# Altium PCB QuickRotor_V1.PcbDoc
Units mil, origin at the board's own origin, x right, y up, seen from the top; angles counter-clockwise.
Board outline 3949.52 x 3949.5 mil, 2 copper layers (Top, Bottom), stack 60.473 mil thick; 66 components, 73 nets, 259 pads, 123 vias.
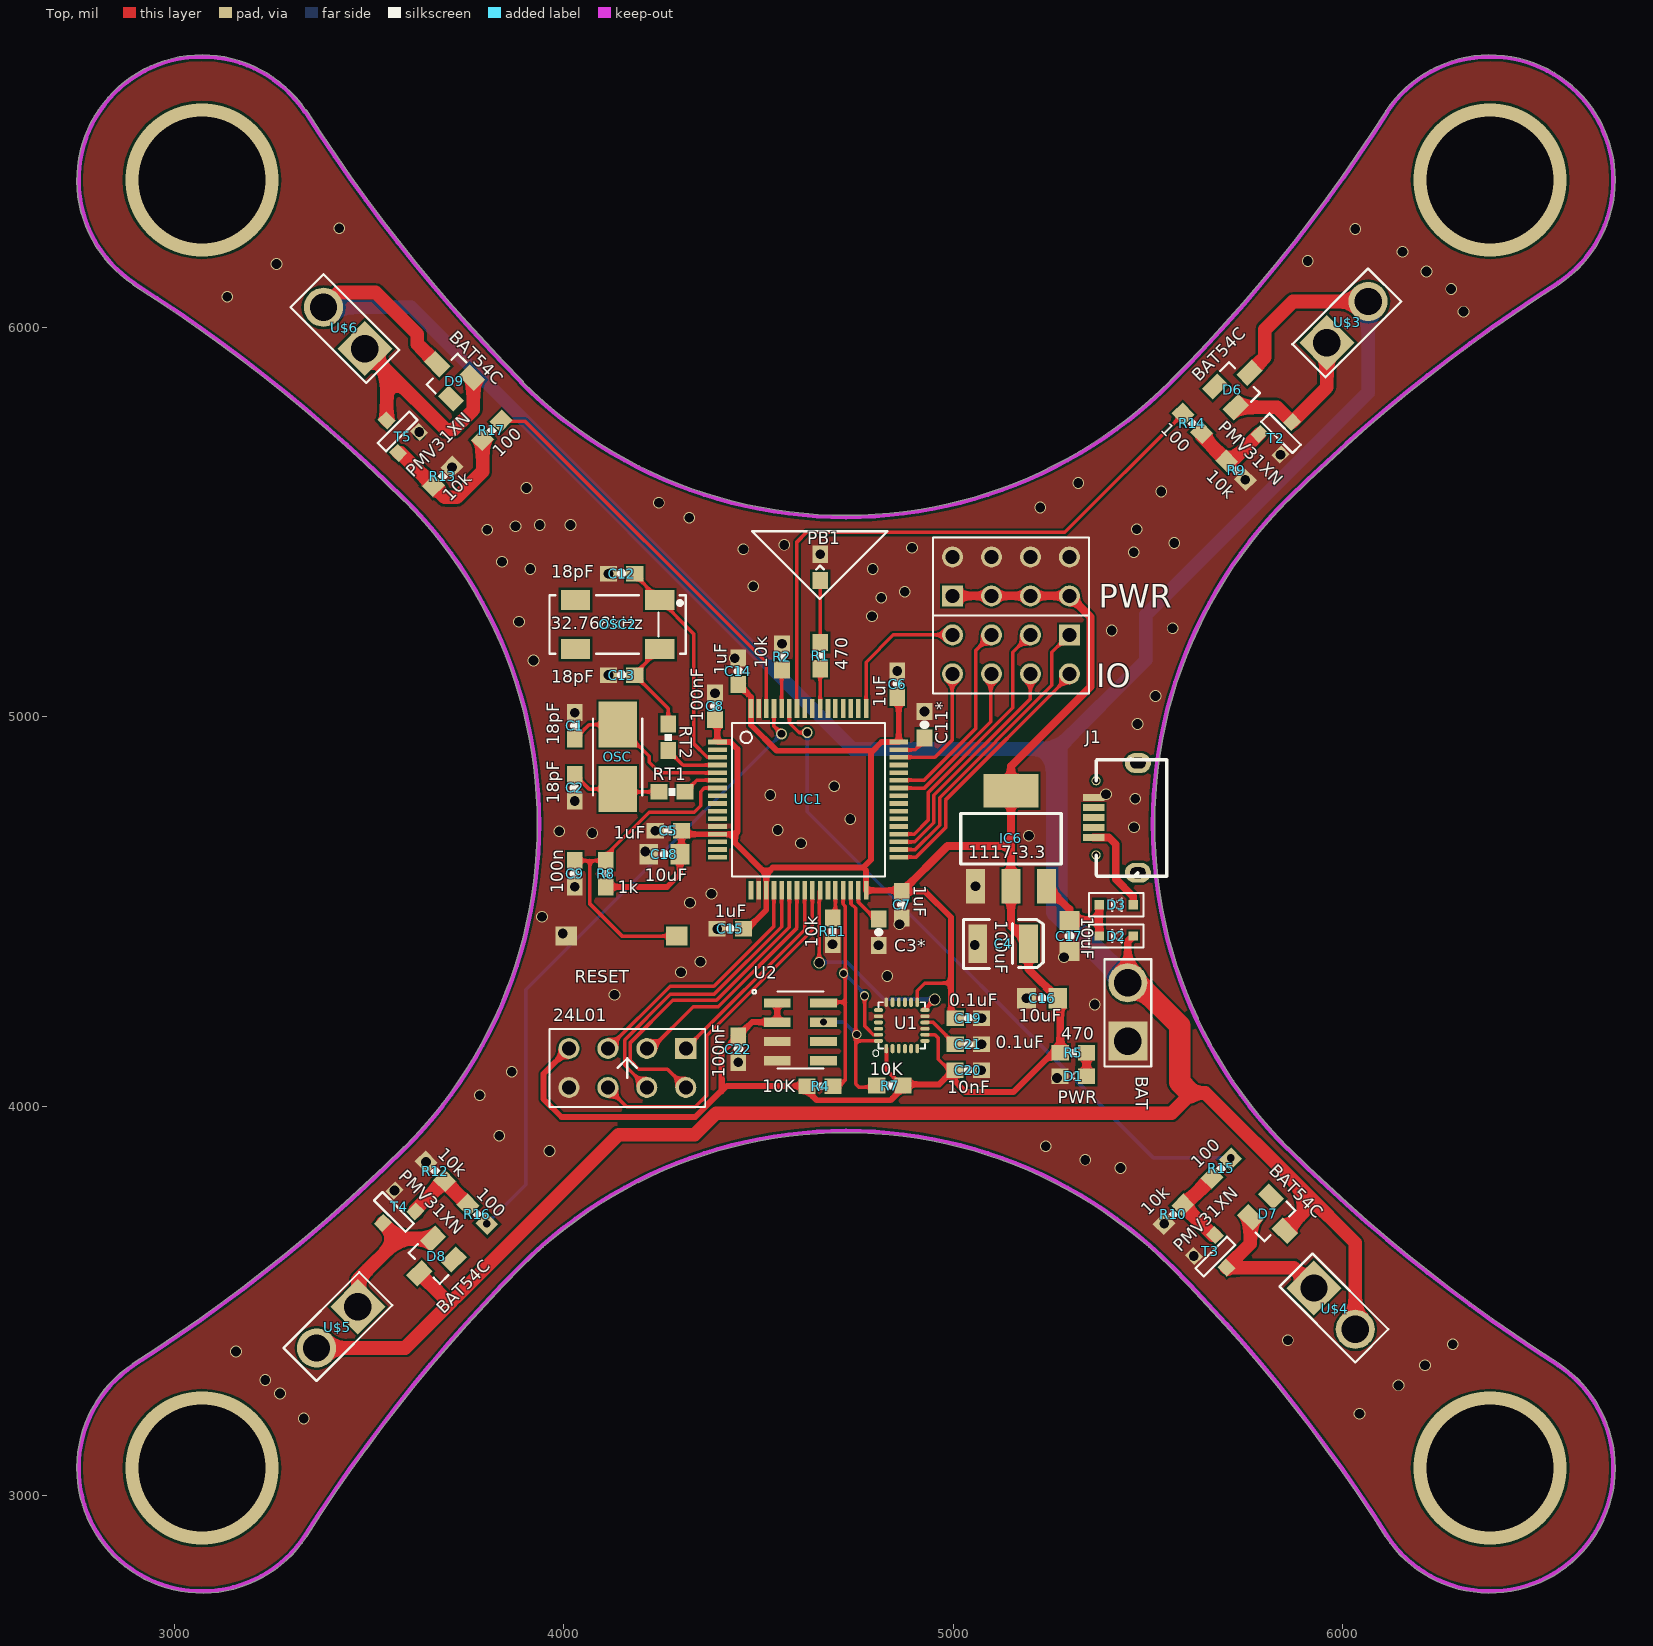
[diagram p0: Top view]
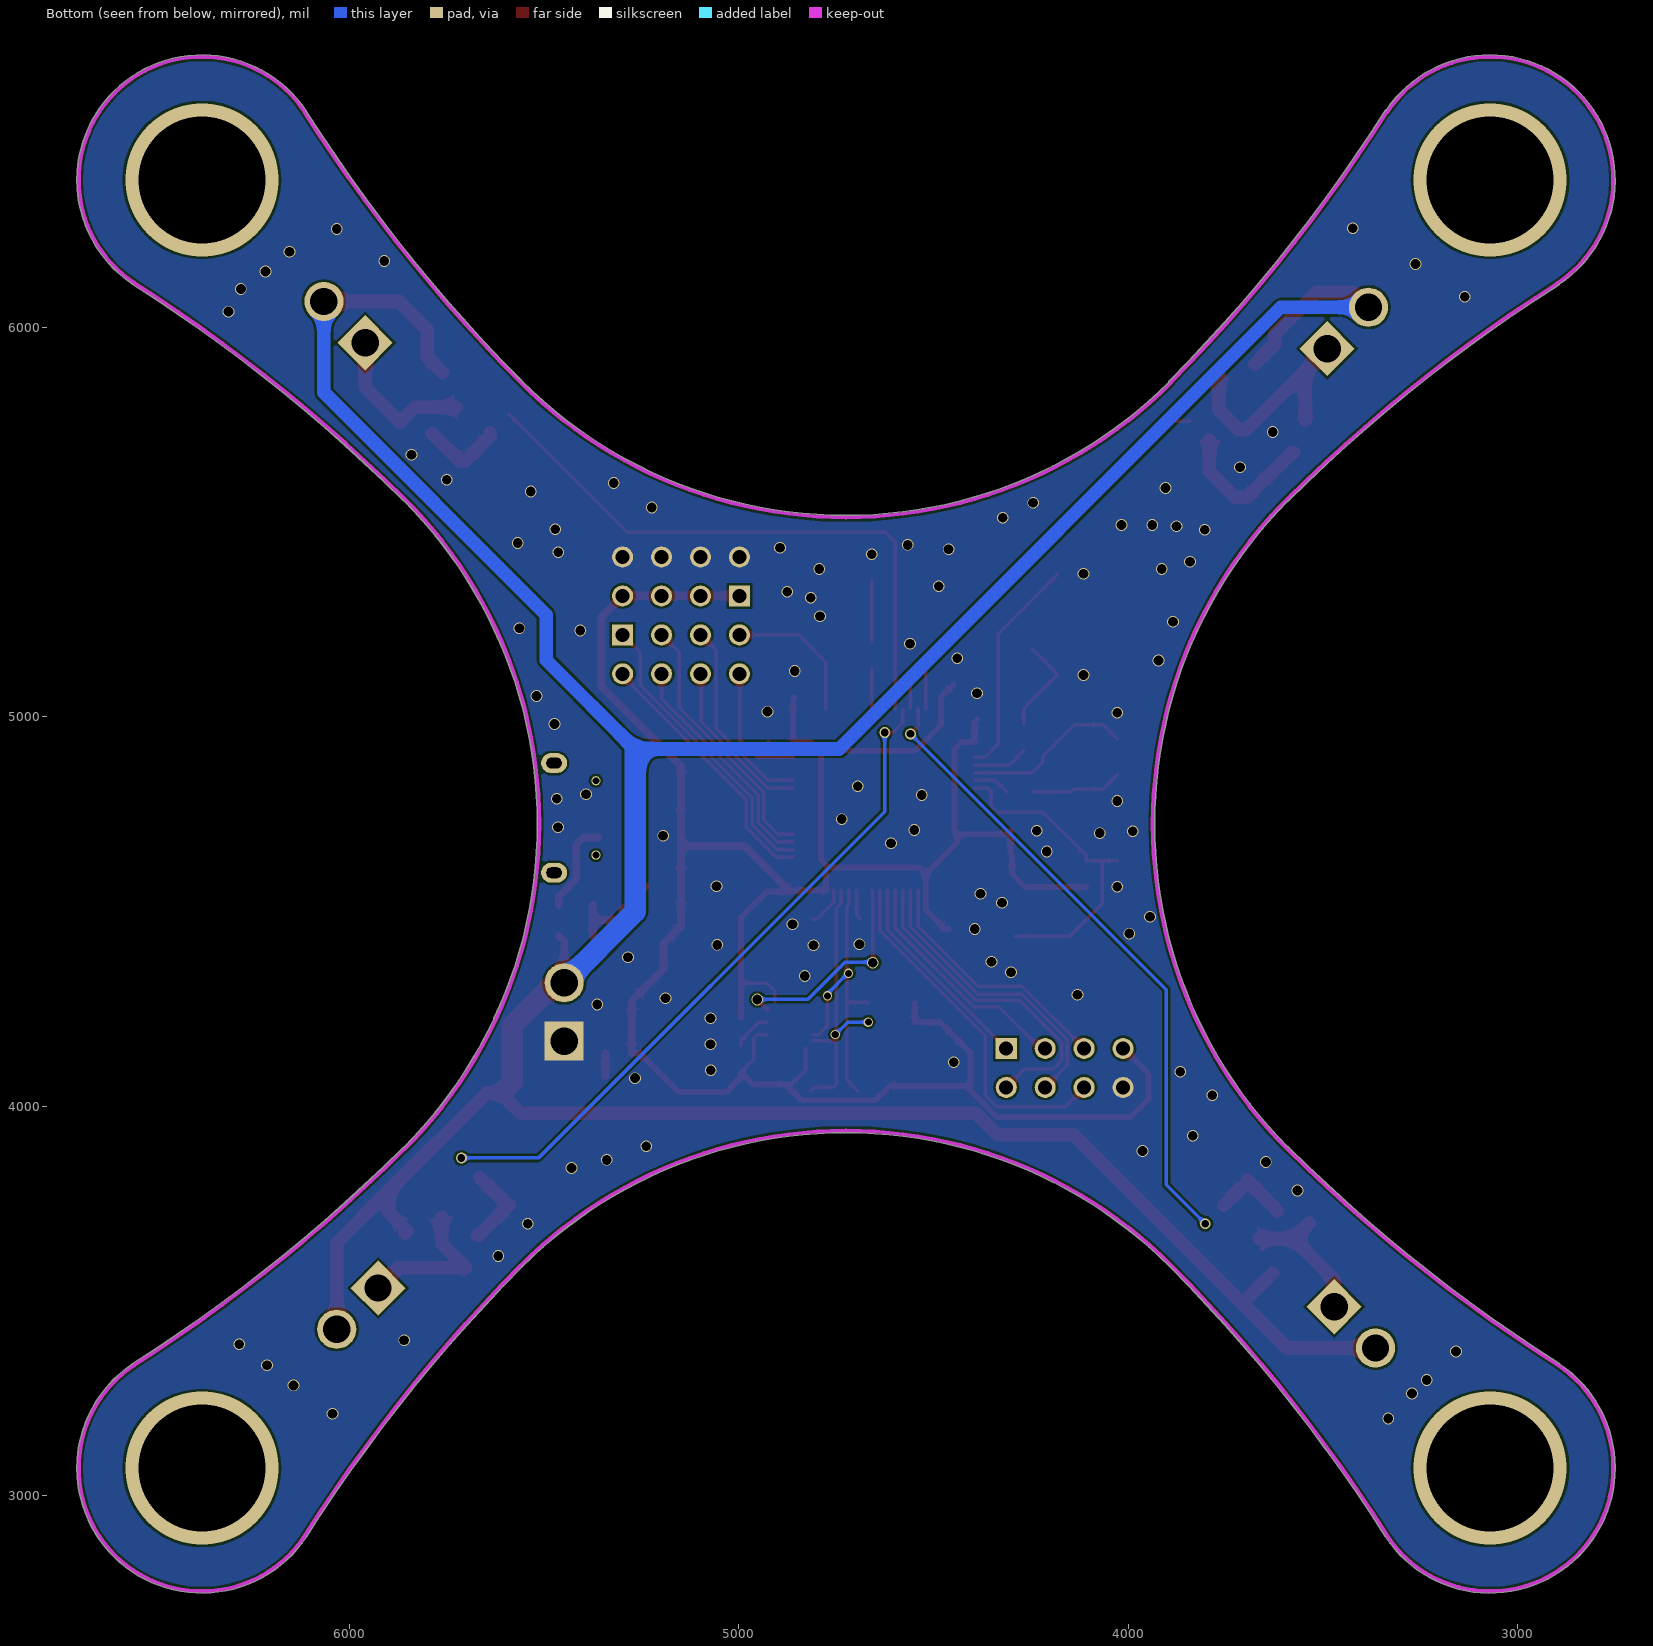
[diagram p1: Bottom view, seen from below]

## Layer stack, top to bottom
Top Solder: solder mask 0.4, Solder Resist, Dk 3.5
Top: signal copper 0.7087
Dielectric 1: core 59.0551, FR-4, Dk 4.8
Bottom: signal copper 0.7087
Bottom Solder: solder mask 0.4, Solder Resist, Dk 3.5

## Board outline
2892.14,3337.77 ccw(c3070.87,3070.87) 3339.09,2894.13 ccw(c3334.9,2896.88) 3339.47,2894.81 cw(c6810,690) 3892.78,3587.51 ccw(c3889.24,3591.07) 3892.79,3587.52 cw(c4724.41,2755.91) 3892.81,3587.55 cw(c4724.41,2755.91) 5556.03,3587.52 ccw(c5559.57,3591.07) 5556.31,3587.26 cw(c2638.82,690) 6109.3,2894.91 ccw(c6113.91,2896.89) 6109.72,2894.13 ccw(c6377.95,3070.87) 6699.17,3070.87 ccw(c6377.95,3070.87) 6557.52,3337.21 ccw(c6553.09,3334.86) 6555.78,3339.1 cw(c8760,6810) 5862.46,3892.8 ccw(c5858.93,3889.24) 5859.93,3894.16 cw(c6692.91,4724.41) 5859.96,5554.69 ccw(c5858.93,5559.6) 5862.47,5556.04 cw(c8760,2638.82) 6555.76,6109.73 ccw(c6553.07,6113.96) 6557.49,6111.59 ccw(c6377.95,6377.95) 6699.17,6377.95 ccw(c6377.95,6377.95) 6110.65,6556.08 ccw(c6114.82,6553.3) 6109.88,6554.17 cw(c2640,8760) 5557.2,5862.46 ccw(c5560.76,5858.93) 5556.67,5861.84 ccw(c5559.57,5857.75) 5556.03,5861.29 cw(c4724.41,6692.91) 3895.41,5858.68 ccw(c3890.4,5858.93) 3895.42,5858.93 ccw(c3890.4,5858.93) 3893.96,5862.47 cw(c6811.18,8760) 3340.27,6555.76 ccw(c3336.04,6553.07) 3336.87,6558.02 ccw(c3070.87,6377.95) 2893.24,6110.31 ccw(c2897.91,6112.14) 2895.22,6107.9 cw(c691,2637) 3588.54,5554.2 ccw(c3592.07,5557.76) 3590.57,5552.97 cw(c2755.91,4724.41) 3931.99,4724.41 cw(c2755.91,4724.41) 3590.03,3895.31 ccw(c3591.07,3890.4) 3587.53,3893.96 cw(c690,6811.18) 2894.24,3340.27 ccw(c2896.93,3336.04) 2892.25,3337.84 ccw(c2894.93,3333.6)

## Design rules (kind name [scope] priority, off if disabled: settings)
Clearance [All] p1: gap=6
ComponentClearance [All] p1: gap=0 collisioncheckmode=3 verticalgap=0 showdistances=FALSE
HoleSize [All] p1: absolutevalues=TRUE maxlimit=248.03 minlimit=11.81 maxpercent=80.000 minpercent=20.000
PolygonConnect [All] p1: connectstyle=Direct reliefconductorwidth=30 reliefentries=4 polygonreliefangle="45 Angle" airgapwidth=10
RoutingVias [All] p1: holewidth=16 width=30 viastyle="Through Hole" minholewidth=12 minwidth=24 maxholewidth=90 maxwidth=100
SolderMaskExpansion [All] p1: expansion=4
Width [All] p1: maxlimit=60 minlimit=6 preferedwidth=17 minimp=50.000000 maximp=50.000000 favimp=50.000000
28 further rules are at their usual default settings.

## Components (designator, comment, footprint, x,y, rotation, side; value= is the part's Value field where it differs from the comment)
24L01 "NRF24L01_MODULE" NRF24L01_MODULE 4313,4148 r270 top
BAT "M021X02_NO_SILK" MOTOR_CONNECTOR 5447.99,4316.81 r270 top
C1 "18pF" 0603-CAP 4027.99,4976.81 r270.02 top
C2 "18pF" 0603-CAP 4027.99,4816.81 r90.02 top
C3* "1uF" 0603-CAP 4807.99,4446.81 r270 top
C4 "100uF" EIA3528 5127.99,4416.81 r0 top
C5 "1uF" 0603-CAP 4267.99,4706.81 r0 top
C6 "1uF" 0603-CAP 4856,5084 r270 top
C7 "1uF" 0603-CAP 4867.99,4516.81 r90.02 top
C8 "100nF" 0603-CAP 4387.99,5026.81 r270 top
C9 "100n" 0603-CAP 4027.99,4596.81 r90 top
C11* "1uF" 0603-CAP 4926,4979 r90.02 top
C12 "18pF" 0603-CAP 4147.99,5366.81 r0 top
C13 "18pF" 0603-CAP 4147.99,5106.81 r0 top
C14 "1uF" 0603-CAP 4447.99,5116.81 r270 top
C15 "1uF" 0603-CAP 4427,4455 r0 top
C16 "10uF" 0805-CAP 5227.99,4276.81 r180.01 top
C17 "10uF" 0805-CAP 5297.99,4436.81 r270.02 top
C18 "10uF" 0805-CAP 4257.99,4646.81 r180.01 top
C19 "0.1uF" 0603-CAP 5039,4226 r180.01 top
C20 "10nF" 0603-CAP 5038,4092 r0 top
C21 "0.1uF" 0603-CAP 5039,4159 r180.01 top
C22 "100nF" 0603-CAP 4447.99,4146.81 r270.02 top
D1 "PWR" 0603-LED 5307.99,4076.81 r180 top
D2 "PMEG2010" SOD-323 5417.99,4436.81 r0 top
D3 "PMEG2010" SOD-323 5417.99,4516.81 r0 top
D6 "BAT54C" SOT23 5729,5852 r315 top
D7 "BAT54C" SOT23 5820,3711 r225 top
D8 "BAT54C" SOT23 3660,3602 r135 top
D9 "BAT54C" SOT23 3706,5874 r45 top
IC6 "1117-3.3" SOT223 5147.99,4686.81 r0 top
IO "Header4x2" Header4x2 5298,5210 r180 top
J1 "MicroUSB" MicroUSB 5350,4690 r90 top
OSC "8MHz" 5032 4137.99,4896.81 r90 top
OSC2 "32.768kHz" SM8 4137.99,5236.81 r180.02 top
PB1 "White" 0603-LED 4658,5383 r90 top
PWR "Header4*2" Header4x2 4998,5310 r0 top
R1 "470" 0603-RES 4658,5157 r270.01 top
R2 "10k" 0603-RES 4560,5153 r90 top
R4 "10K" 0603-RES 4658,4051 r180.01 top
R5 "470" 0603-RES 5307.99,4136.81 r0 top
R7 "10K" 0603-RES 4837,4053 r0 top
R8 "1k" 0603-RES 4107.99,4596.81 r270 top
R9 "10k" 0603-RES 5726,5632 r135 top
R10 "10k" 0603-RES 5565,3722 r45 top
R11 "10k" 0603-RES 4690,4449 r90 top
R12 "10k" 0603-RES 3670,3833 r315 top
R13 "10k" 0603-RES 3689,5617 r225 top
R14 "100" 0603-RES 5614,5753 r135 top
R15 "100" 0603-RES 5688,3840 r45 top
R16 "100" 0603-RES 3778,3722 r315 top
R17 "100" 0603-RES 3815,5735 r45 top
RESET "SWITCH-MOMENTARY-2-SMD-1101NE" TACTILE-SWITCH-1101NE 4147.99,4436.81 r0 top
RT1 "Res1" 0603-RES 4277.99,4806.81 r180 top
RT2 "Res1" 0603-RES 4267.99,4946.81 r90 top
T2 "PMV31XN" SOT-23 5842,5727 r135 top
T3 "PMV31XN" SOT-23 5672,3613 r45 top
T4 "PMV31XN" SOT-23 3563,3729 r315 top
T5 "PMV31XN" SOT-23 3574,5733 r225 top
U1 "MPU-9250" QFN-24/3MM 4867.99,4206.81 r90 top
U2 "MS5611-01BA01" MS5611-01BA01 4547.99,4096.81 r0 top
U$3 "MOTOR_CONNECTOR" MOTOR_CONNECTOR 6065,6066 r225 top
U$4 "MOTOR_CONNECTOR" MOTOR_CONNECTOR 6032,3427 r135 top
U$5 "MOTOR_CONNECTOR" MOTOR_CONNECTOR 3365,3379 r45 top
U$6 "MOTOR_CONNECTOR" MOTOR_CONNECTOR 3383,6051 r315 top
UC1 "STM32F2x5" TQFP-10X10-64 4627.99,4786.81 r0 top

## Footprints (in the part's own frame and the unit in brackets; to place one, negate y for a bottom-side part, rotate by r counter-clockwise, add the part's x,y. Pads: shape width x height; smd on the part's side, far side on the other; paste and mask are expansions set on the pad)
0603-CAP [mil] "0603-CAP"
  rect 44x40 smd: 1(-33.46,0) 2(34,0)
  silkscreen extent 0,-1 0,2
0603-LED [mil] "0603-RES"
  rect 44x40 smd: A(-33.46,0) C(34,0)
  silkscreen extent -5,-10 5,10
0603-RES [mil] "0603-RES"
  rect 44x40 smd: 1(-33.46,0) 2(34,0)
  silkscreen extent -9,-10 9,10
0805-CAP [mil] "C0805"
  rect 48x52 smd: 1(-40,0) 2(40,0)
  silkscreen extent 0,-1 0,2
5032 [mm]
  rect 3x2.5 smd: 1(-2.1,0) 2(2.1,0)
  silkscreen extent -2.5,-1.6 2.5,1.6
EIA3528 [mil] "EIA3528"
  rect 48x99 smd: A(65,0) C(-64.96,0)
  silkscreen extent -102,-63 103,62
Header4x2 [mil]
  rect 54x54 hole 36: 1(0,0)
  round 54 hole 36: 2(100,0) 3(200,0) 4(300,0) 5(300,100) 6(200,100) 7(100,100) 8(0,100)
  silkscreen extent -50,-50 350,150
MicroUSB [mm]
  rect 0.457x1.397 smd: 1(2.6,-0.254) 2(1.95,-0.254) 3(1.3,-0.254) 4(0.65,-0.254) 5(0,-0.254)
  round 0.6 hole 0.45: 5_2(-1.155,-0.42) 6(3.695,-0.42)
  oval 1.3x1.7 hole 0.7 slot 1 at 90 deg: 7(-2.305,-3.15) 8(4.845,-3.15)
  silkscreen extent -2.54,-5.03 5.13,-0.42
MOTOR_CONNECTOR [mil] "MOTOR_CONNECTOR"
  round 100.5 hole 70: P1(0,0)
  rect 100.5x100.5 hole 70: P2(150,0)
  silkscreen extent -60,-60 215,60
MS5611-01BA01 [mil] "MS5611-01BA01"
  rect 69x24 smd: 1(0,168) 2(0,119) 3(0,69) 4(0,20) 5(119,20) 6(119,69) 7(119,119) 8(119,168)
  silkscreen extent -64,0 119,202
NRF24L01_MODULE [mil] "NRF24L01_MODULE"
  rect 54x54 hole 36: P1(0,0)
  round 54 hole 36: P2(0,-100) P3(0,-200) P4(0,-300) P5(100,-300) P6(100,-200) P7(100,-100) P8(100,0)
  silkscreen extent -50,-350 150,50
QFN-24/3MM [mil] "QFN-24/3MM"
  rrect100% 24x9.7 smd: 1(-59.06,40) 2(-59.06,24) 3(-59.06,8) 4(-59.06,-7.87) 5(-59.06,-23.62) 6(-59.06,-39.37) 13(60,-39.37) 14(60,-23.62) 15(60,-7.87) 16(60,8) 17(60,24) 18(60,40)
  rrect100% 9.7x24 smd: 7(-39.37,-59.06) 8(-23.62,-59.06) 9(-7.87,-59.06) 10(8,-59.06) 11(24,-59.06) 12(40,-59.06) 19(40,60) 20(24,60) 21(8,60) 22(-7.87,60) 23(-23.62,60) 24(-39.37,60)
  silkscreen extent -79,-59 60,75
SM8 [mm]
  rect 1.9x1.3 smd: 1(-2.75,-1.6) 2(2.75,-1.6) 3(2.75,1.6) 4(-2.75,1.6)
  silkscreen extent -4.45,-1.91 4.45,1.91
SOD-323 [mil] "SOD-323"
  rect 24x24 smd: A(44,0) C(-43.31,0)
  silkscreen extent -70,-30 70,30
SOT23 [mil] "SOT23"
  rect 40x56 smd: 1(-37.4,-43.31) 2(38,-43.31) 3(0,44)
  silkscreen extent -56,-6 56,26
SOT223 [mil] "SOT223"
  rect 48x88 smd: 1(-91,-122) 2(0,-122) 3(91,-122)
  rect 142x87 smd: 4(0,123)
  silkscreen extent -129,-65 129,65
SOT-23 [mil] "SOT-23"
  rect 31x35 smd: 1(1,-40) 2(-37,40) 3(39,40)
  silkscreen extent -56,-15 58,15
TACTILE-SWITCH-1101NE [mil] "TACTILE-SWITCH-1101NE"
  rect 56x48 smd: P$1(-141.73,0) P$2(142,0)
TQFP-10X10-64 [mil] "TQFP-10X10-64"
  rect 48x12 smd: P$1(-233.72,148) P$2(-233.72,128) P$3(-233.72,109) P$4(-233.72,89) P$5(-233.72,69) P$6(-233.72,50) P$7(-233.72,30) P$8(-233.72,10) P$9(-233.72,-9.84) P$10(-233.72,-29.53) P$11(-233.72,-49.21) P$12(-233.72,-68.9) P$13(-233.72,-88.58) P$14(-233.72,-108.27) P$15(-233.72,-127.95) P$16(-233.72,-147.64) P$33(232,-147.64) P$34(232,-127.95) P$35(232,-108.27) P$36(232,-88.58) P$37(232,-68.9) P$38(232,-49.21) P$39(232,-29.53) P$40(232,-9.84) P$41(232,10) P$42(232,30) P$43(232,50) P$44(232,69) P$45(232,89) P$46(232,109) P$47(232,128) P$48(232,148)
  rect 12x48 smd: P$17(-147.64,-232.72) P$18(-127.95,-232.72) P$19(-108.27,-232.72) P$20(-88.58,-232.72) P$21(-68.9,-232.72) P$22(-49.21,-232.72) P$23(-29.53,-232.72) P$24(-9.84,-232.72) P$25(10,-232.72) P$26(30,-232.72) P$27(50,-232.72) P$28(69,-232.72) P$29(89,-232.72) P$30(109,-232.72) P$31(128,-232.72) P$32(148,-232.72) P$49(148,234) P$50(128,234) P$51(109,234) P$52(89,234) P$53(69,234) P$54(50,234) P$55(30,234) P$56(10,234) P$57(-9.84,234) P$58(-29.53,234) P$59(-49.21,234) P$60(-68.9,234) P$61(-88.58,234) P$62(-108.27,234) P$63(-127.95,234) P$64(-147.64,234)
  silkscreen extent -197,-197 197,197

## Part data
BAT: "Header 2Standard 2-pin 0.1\" header. Use with straight break away headers (SKU : PRT-00116), right angle break away headers (PRT-00553), swiss pins (PRT-00743), machine pins (PRT-00117), and female headers (PRT-00115). Molex polarized connector foot print use with SKU : PRT-08233 with associated crimp pins and housings."
C1 C2 C3* C5 C6 C7 C8 C9 C11* C12 C13 C14 C15: library part C_0603, "NON-POLARIZED CAP"
C4: library part CAP_POL3528, "Capacitor PolarizedThese are standard SMD and PTH capacitors. Normally 10uF, 47uF, and 100uF in electrolytic and tantalum varieties. Always verify the external diameter of the through hole cap, it varies with capacity, voltage, and manufacturer. The EIA devices should be standard."
C16 C17 C18: library part C_0805, "NON-POLARIZED CAP"
C19 C20 C21: library part CC0603, "CAPACITOR, European symbol"
C22: library part CAP0603-CAP, "CapacitorStandard 0603 ceramic capacitor, and 0.1\" leaded capacitor."
D1 PB1: library part LEDCHIP-LED0603, "LED   OSRAM: - CHIPLED LG R971, LG N971, LY N971, LG Q971, LY Q971, LO R971, LY R971 LH N974, LH R974 LS Q976, LO Q976, LY Q976 LO Q996 - Hyper CHIPLED LW Q18S LB Q993, LB Q99A, LB R99A - SideLED LS A670, LO A670, LY A670, LG A670, LP A670 LB A673, LV A673, LT A673, LW A673 LH A674 LY A675 LS A676, LA A676, LO A676, LY A676, LW A676 LS A679, LY A679, LG A679 -  Hyper Micro SIDELED? LS Y876, LA Y876, LO Y876, LY Y876 LT Y87S - SmartLED LW L88C, LW L88S LB L89C, LB L89S, LG L890 LS L89K, LO L89K, LY L89K LS L896, LA L896, LO L896, LY L896 - TOPLED LS T670, LO T670, LY T670, LG T670, LP T670 LSG T670, LSP T670, LSY T670, LOP T670, LYG T670 LG T671, LOG T671, LSG T671 LB T673, LV T673, LT T673, LW T673 LH T674 LS T676, LA T676, LO T676, LY T676, LB T676, LH T676, LSB T676, LW T676 LB T67C, LV T67C, LT T67C, LS T67K, LO T67K, LY T67K, LW E67C LS E67B, LA E67B, LO E67B, LY E67B, LB E67C, LV E67C, LT E67C LW T67C LS T679, LY T679, LG T679 LS T770, LO T770, LY T770, LG T770, LP T770 LB T773, LV T773, LT T773, LW T773 LH T774 LS E675, LA E675, LY E675, LS T675 LS T776, LA T776, LO T776, LY T776, LB T776 LHGB T686 LT T68C, LB T68C - Hyper Mini TOPLED? LB M676 - Mini TOPLED Santana? LG M470 LS M47K, LO M47K, LY M47K    Source: http://www.osram.convergy.de   LUXEON: - LUMILED? LXK2-PW12-R00, LXK2-PW12-S00, LXK2-PW14-U00, LXK2-PW14-V00 LXK2-PM12-R00, LXK2-PM12-S00, LXK2-PM14-U00 LXK2-PE12-Q00, LXK2-PE12-R00, LXK2-PE12-S00, LXK2-PE14-T00, LXK2-PE14-U00 LXK2-PB12-K00, LXK2-PB12-L00, LXK2-PB12-M00, LXK2-PB14-N00, LXK2-PB14-P00, LXK2-PB14-Q00 LXK2-PR12-L00, LXK2-PR12-M00, LXK2-PR14-Q00, LXK2-PR14-R00 LXK2-PD12-Q00, LXK2-PD12-R00, LXK2-PD12-S00 LXK2-PH12-R00, LXK2-PH12-S00 LXK2-PL12-P00, LXK2-PL12-Q00, LXK2-PL12-R00    Source: www.luxeon.com   KINGBRIGHT:   KA-3528ASYC Source: www.kingbright.com"
D2 D3: library part DIODESOD-323, "Diode   SMADIODE - SMA Surface Mount Package  20V 1A Schottky Diode Digikey: 641-1014-6-ND    DO-1N4148 - Through Hole Small Current Diode SOD-123 20V 1 A (.5mV Vf) Schottky Diode - Digikey: MBRX120TPMSCT-ND    SOD-323 10V 570mA (.38mV Vf, 3ns) Schottky Diode - Digikey: ZLLS410CT-ND    SOD-523 30V 30mA Schottky Diode (RB751S-40TE61) - Digikey: RB751S-40TE61CT-ND    SOT23-R/W - SOT23 Package (R = Solder Paste/Reflow Ovens, W = Hand-Soldering)  BAT54Film 40V 300mA - Digikey: 497-7162-1-ND"
D6 D7 D8 D9: "Schottky Diodes   Source: Fairchild .. BAT54.pdf"
IC6: library part V_REG_LM1117SOT223, "Voltage Regulator LM1117Standard adjustable voltage regulator but in SMD form. Spark Fun Electronics SKU : COM-00595"
IO PWR: library part Component_1
J1: "Imported"
OSC: library part CRYSTAL5X3, "CrystalsVarious standard crystals. Proven footprints. Spark Fun Electronics SKU : COM-00534"
OSC2: library part CRYSTALL
R1 R2 R5 R8 R11: library part R_0603, "RESISTOR"
R4 R7 R9 R10 R12 R13 R14 R15 R16 R17: library part RESISTOR0603, "ResistorBasic schematic elements and footprints for 0603, 1206, and PTH resistors."
RT1 RT2: "Resistor"
T2 T3 T4 T5: library part NMOSSOT23, "MOS FET"
U1: "GYRO/ACCEL/COMPASS/9-AXIS"
UC1: library part STM32F103

## Via types
v1: diameter 30, hole 25, Top to Bottom, 110 vias
v2: diameter 28, hole 20, Top to Bottom, 5 vias
v3: diameter 24, hole 18, Top to Bottom, 4 vias
v4: diameter 393.7, hole 326.77, Top to Bottom, 4 vias

## Nets (pads, with @x,y where several pads share a name; then routed paths per layer and width w, separated by ;. In a path a pad name is that pad's centre, name@x,y a point inside that pad or via, vN(x,y) a via of type N, cw(c..) or ccw(c..) an arc to the next point about the centre after c; other vN are vias at no path point)
+5V: D3.A J1.5 | length 238.3
  Top w20: J1.5 5399,4690 5417,4672 5417,4583 5461.99,4538.01 D3.A
BOOT0_60: R2.1 UC1.P$60 | length 93
  Top w9: R2.1@4557.99,5113.35 4559.09,5112.25 UC1.P$60
BOOT1_28: R11.2 UC1.P$28 | length 77
  Top w9: R11.2@4687.99,4480.81 4696.99,4489.81 UC1.P$28
GND: 24L01.P5 BAT.P2 C1.1 C2.1 C3*.2 C4.C C5.1 C6.1 C7.1 C8.1 C9.1 C11*.2 C12.1 C13.1 C14.1 C15.1 C16.2 C17.2 C18.2 C19.1 C20.2 C21.1 C22.2 D1.C IC6.1 J1.1 PB1.C PWR.5 PWR.6 PWR.7 PWR.8 R2.2 R9.1 R10.1 R11.1 R12.1 R13.1 RESET.P$1 T2.2 T3.2 T4.2 T5.2 U1.9 U1.11 U1.18 U1.20 U2.3 U2.4 UC1.P$12 UC1.P$18 UC1.P$63 | length 6
  Top w20: T5.2@3628.45,5724.88 v1(3628.45,5730.88)
  other v1: 3332,3198 6043,3210 3271,3262 6143,3283 3233,3297 6211,3335 3158,3370 6282,3389 5859,3399 5617.55,3615.12 5541.34,3698.34 3565.12,3783.45 5429,3841 3646.34,3856.66 5339,3862 3963,3885 5237,3897 3834,3924 3784,4028 5266,4072 3866,4088 5072,4092 4448,4112.81 5072.46,4159.01 5072.46,4226.01 5363,4261 5187.99,4276.8 4130,4286 4830,4334 4301,4344 4351,4371 5284,4382 4807.99,4412.81 5055,4414 4690,4415.54 3997,4443 4393.54,4455 4862,4467 3944,4486 4324,4522 4379,4545 4027.99,4563.35 5056.99,4564.81 4209,4654 4609,4675 5194,4694 4073,4701 3988,4706 4234.53,4706.81 4549,4709 5464,4716 4735,4737 4028,4783.35 5467,4789 4530,4799 5392,4801 4694,4821 5473,4981 4027.98,5010.28 4925.99,5013 5519,5053 4387.99,5060.28 4114.53,5106.81 4856,5117.46 3922,5144 4439,5150 4560,5187 5407,5221 5563,5227 3885,5244 4791,5258 4815,5305 4875,5321 4486,5335 4114.53,5366.81 3914,5379 4793,5379 3841,5398 4658,5417 5463,5422 4461,5430 4894,5434 4566,5441 5567,5446 3803,5480 5471,5481 3876,5489 3938,5492 4017,5492 4322,5511 5223,5537 4244,5549 5534,5578 3904,5587 5321,5600 5749.66,5608.34 3712.66,5640.66 5839.88,5672.55 6310,6040 3136,6078 6278,6098 6215,6143 3262,6162 5910,6170 6153,6194 6032,6252 3423,6254
NetC2_2: C2.2 OSC.1 RT1.2 | length 234.2
  Top w9: C2.2 4064.66,4814.13 OSC.1 4145.31,4806.81 RT1.2
NetC3*_1: C3*.1 UC1.P$31 | length 100.2
  Top w9: UC1.P$31 4755.99,4524.01 4799.72,4480.28 C3*.1
NetC11*_1: C11*.1 UC1.P$47 | length 73.6
  Top w9: UC1.P$47 4902.54,4914.81 C11*.1@4924.53,4936.8
NetC13_2: C13.2 OSC2.4 RT2.2 | length 255.3
  Top w9: OSC2.4 4181.99,5109.57 C13.2 4267.99,5020.81 RT2.2
NetC21_2: C21.2 U1.10 | length 113.3
  Top w9: U1.10 4948.13,4214.81 4993.99,4168.95 4993.99,4156.81 C21.2@4993.99,4172.01
NetD1_A: D1.A R5.2 | length 60.2
  Top w20: D1.A 5341.99,4077.35 R5.2
NetD6_2: D6.2 T2.1 U$3.P2 | length 401.2
  Top w35: D6.2 5831.06,5794.51 T2.1 5958.93,5845.35 U$3.P2
NetD7_2: D7.2 T3.1 U$4.P2 | length 401.4
  Top w35: D7.2 5762.51,3646.94 T3.1 5873.58,3585.42 U$4.P2
NetD8_2: D8.2 T4.1 U$5.P2 | length 363
  Top w35: U$5.P2 3471.07,3554.62 3575.94,3659.49 ; T4.1 3575.94,3659.49 ; D8.2 3575.94,3659.49
NetD9_2: D9.2 T5.1 U$6.P2 | length 600.8
  Top w35: U$6.P2 3545.01,5888.99 ; T5.1 3545.01,5888.99 ; D9.2 3767.62,5870.25 3767.62,5787.62 3717,5737 3697,5737 3545.01,5888.99
NetPB1_A: PB1.A R1.1 | length 159.1
  Top w9: R1.1 PB1.A
NetR9_2: R9.2 R14.1 T2.3 | length 213.2
  Top w35: R14.1 5637.66,5720.34 R9.2 5715.89,5656.04 T2.3
NetR10_2: R10.2 R15.1 T3.3 | length 218.6
  Top w35: R15.1 5594.04,3746.04 R10.2 5666.22,3668.86 T3.3
NetR12_2: R12.2 R16.1 T4.3 | length 198.7
  Top w35: T4.3 3618.86,3733.78 R12.2 3694.04,3805.96 R16.1
NetR13_2: R13.2 R17.1 T5.3 | length 373.5
  Top w35: T5.3 3580.78,5677.14 R13.2 3695,5562.92 3724.92,5562.92 3791.34,5629.34 R17.1
NRST_7: C9.2 R8.1 RESET.P$2 UC1.P$7 | length 841.2
  Top w9: C9.2 4028.53,4630.28 4067,4630.28 ; RESET.P$2 4149.19,4436.81 4067,4519 4067,4630.28 ; UC1.P$7 4360.81,4816.81 4351,4807 4351,4771 4335,4755 4219,4755 4107.99,4643.99 R8.1 4067,4630.28
OSC32_IN_3: C12.2 OSC2.1 UC1.P$3 | length 574.1
  Top w9: C12.2 4181.99,5364.09 OSC2.1 4333,5213.08 4333,4931.24 4368.43,4895.81 UC1.P$3
OSC32_OUT_4: RT2.1 UC1.P$4 | length 141.8
  Top w9: RT2.1 4305.53,4875.81 UC1.P$4
OSC_IN_5: C1.2 OSC.2 UC1.P$5 | length 441.8
  Top w9: C1.2 4064.68,4979.49 OSC.2 4219,4898.48 4219,4883 4246.19,4855.81 UC1.P$5
OSC_OUT_6: RT1.1 UC1.P$6 | length 95.2
  Top w9: RT1.1 4341.46,4836.81 UC1.P$6
PA8_41: UC1.P$41
PA15_50: UC1.P$50
PB0_26: U1.12 UC1.P$26 | length 560.4
  Top w9: v1(4655.5,4368.5) 4655.5,4551.6 UC1.P$26 ; U1.12 4927.05,4249.05 v1(4952,4274)
  Bottom w9: v1@4655.5,4370 4726,4370 4822,4274 v1(4952,4274)
PB1_27: UC1.P$27
PB3_55: R1.2 UC1.P$55 | length 102.2
  Top w9: UC1.P$55 R1.2
PB4_56: UC1.P$56
PB5_57: UC1.P$57
PB6_SCL_58: R14.2 UC1.P$58 | length 1555.2
  Top w9: UC1.P$58 4598.46,5448.46 4623,5473 5285.92,5473 R14.2
PB7_SDA_59: R15.2 UC1.P$59 | length 1751.5
  Top w9: UC1.P$59 4578.78,4984.22 4604,4959 v2(4625,4959)
  Bottom w9: v2(4625,4959) 4625,4756 5514,3867 v2(5712,3867)
  other v2: 5712,3867
PB8_61: R16.2 UC1.P$61 | length 1644.5
  Top w9: UC1.P$61 4539.41,4975.59 v2(4559,4956)
  Bottom w9: v2(3802.04,3697.96) 3902,3797.92 3902,4299 v2(4559,4956)
PB9_62: R17.2 UC1.P$62 | length 1055.9
  Top w9: R17.2 3899.96,5759.04 4519.72,5139.28 UC1.P$62
PB10_SCL_29: R4.1 U1.23 U2.8 UC1.P$29 | length 792
  Top w9: U2.8 4669.18,4267 4723,4267 ; R4.1@4693.46,4038.01 4723,4067.54 4723,4267 ; UC1.P$29 4716.99,4518.01 4723,4512 4723,4267 ; v3(4772,4283) 4772,4206 4780,4198 4780.04,4198.04 4794.48,4183.59 4807.99,4183.59 U1.23
  Bottom w9: v3(4718,4341) 4720,4341 4772,4289 v3(4772,4283)
PB11_SDA_30: R7.1 U1.24 U2.7 UC1.P$30 | length 733.7
  Top w9: UC1.P$30 4736.99,4520.01 4749,4508 4749,4057 4757,4049 4804.54,4049 R7.1@4815.54,4038 ; 4749,4167.44 U1.24
  Bottom w9: v3(4666.99,4215.81) 4720.19,4215.81 v3(4752,4184)
PC0_8: UC1.P$8
PC1_9: UC1.P$9
PC2_10: UC1.P$10
PC3_11: UC1.P$11
PC4_24: 24L01.P1 UC1.P$24 | length 532.5
  Top w9: 24L01.P1 4618.15,4453.15 UC1.P$24
PC5_25: 24L01.P6 UC1.P$25 | length 927.1
  Top w9: 24L01.P6 4113,4046 4161,3998 4337.7,3998 4367,4027.3 4367,4180.79 4637.99,4451.78 UC1.P$25
PC6_37: UC1.P$37
PC7_38: UC1.P$38
PC8_39: UC1.P$39
PC9_40: UC1.P$40
PC10_51: UC1.P$51
PC11_52: UC1.P$52
PC12_DISC_53: UC1.P$53
PC13_2: UC1.P$2
PD2_54: UC1.P$54
SPI1_MISO_22: 24L01.P8 UC1.P$22 | length 843
  Top w9: 24L01.P8 4266,4095 4192,4095 4171,4116 4171,4163.57 4279.43,4272 4391.79,4272 4578.78,4458.99 UC1.P$22
SPI1_MOSI_23: 24L01.P2 UC1.P$23 | length 610.3
  Top w9: 24L01.P2 4225,4148 4332,4255 4396,4255 4598.46,4457.46 UC1.P$23
SPI1_NSS_20: 24L01.P3 UC1.P$20 | length 648.5
  Top w9: 24L01.P3 4273.01,4308 4385.36,4308 4539.41,4462.05 UC1.P$20
SPI1_SCK_21: 24L01.P7 UC1.P$21 | length 762.5
  Top w9: 24L01.P7 4156,4105 4156,4169.78 4273.22,4287 4385.57,4287 4559.09,4460.52 UC1.P$21
SPI2_MISO_35: IO.7 UC1.P$35 | length 595.6
  Top w9: UC1.P$35 4901.12,4678.54 4950,4727.43 4950,4798.43 5198,5046.43 IO.7
SPI2_MOSI_36: IO.2 UC1.P$36 | length 675
  Top w9: UC1.P$36 4899.59,4698.23 4935,4733.64 4935,4804.64 5153,5022.64 5153,5165 IO.2
SPI2_NSS_33: IO.8 UC1.P$33 | length 684.6
  Top w9: UC1.P$33 4904.17,4639.17 4980,4715 4980,4786 5299,5105 5303,5105 IO.8
SPI2_SCK_34: IO.1 UC1.P$34 | length 757.6
  Top w9: UC1.P$34 4902.65,4658.86 4965,4721.21 4965,4792.21 5253,5080.21 5253,5165 IO.1
SWCLK_49: IO.4 UC1.P$49 | length 370.2
  Top w9: UC1.P$49 4775.99,5139.99 4846,5210 IO.4
SWDAT_46: IO.5 UC1.P$46 | length 325.7
  Top w9: UC1.P$46 4952.81,4895.81 4997,4940 4997,5109 IO.5
USART1_RX_43: IO.3 UC1.P$43 | length 509.7
  Top w9: UC1.P$43 4924.74,4836.81 5057,4969.07 5057,5169 IO.3
USART1_TX_42: IO.6 UC1.P$42 | length 430.4
  Top w9: UC1.P$42 4925.96,4816.81 5096,4986.85 5096,5108 IO.6
USART2_CTS_14: UC1.P$14
USART2_RTS_15: UC1.P$15
USART2_RX_17: UC1.P$17
USART2_TX_16: UC1.P$16
USBDM_44: UC1.P$44
USBDP_45: UC1.P$45
V_MOT: BAT.P1 D2.A D6.3 D7.3 D8.3 D9.3 U$3.P1 U$4.P1 U$5.P1 U$6.P1 | length 9383.3
  Top w20: BAT.P1 5447.99,4422.81 D2.A
  Top w35: U$5.P1 3592,3379 3713,3500 ; U$6.P1 3421,6089 3517,6089 3624,5982 3624,5956 D9.3 ; D8.3 3653.89,3545.89 3654.89,3545.89 3700.77,3500 ; 3724,3510 4141,3927 4336,3927 4391,3982 5560,3982 5610,4032 ; BAT.P1 BAT.P1@5467.8,4297 ; 5608,4034 5647,4034 5899,3782 ; D6.3 5800,5923 5800,5994 5872,6066 U$3.P1 ; D7.3@5857,3674 D7.3 5899,3727.77 5899,3782 ; U$4.P1 6032,3649 5899,3782
  Top w55: BAT.P1 5471.19,4316.81 5581,4207 5581,4061 5608,4034
  Bottom w35: U$6.P1 3608,6051 4742,4917 5266,4917 5494,5145 5494,5261 6065,5832 U$3.P1
  Bottom w55: 5266,4917 5266,4498.8 BAT.P1
VCC: 24L01.P4 C4.A C5.2 C6.2 C7.2 C8.2 C14.2 C15.2 C16.1 C18.1 C19.2 C20.1 C22.1 IC6.2 IC6.4 PWR.1 PWR.2 PWR.3 PWR.4 R4.2 R5.1 R7.2 R8.2 U1.1 U1.8 U1.13 U2.1 U2.2 UC1.P$1 UC1.P$13 UC1.P$19 UC1.P$32 UC1.P$48 UC1.P$64 | length 7209.2
  Top w9: U1.13 4907.36,4296.36 4927,4316 4993.99,4316 ; U1.8 4952.81,4183.19 4961,4175 4961,4120.34 C20.1@4994.53,4086.81
  Top w10: U1.1 4827.99,4093.01 R7.2@4865,4056
  Top w15: 24L01.P4 3948,4082.99 3948,4018 3994,3972 4337.16,3972 4403.16,4038 4405,4038 ; R8.2 4264.81,4562.81 4297.99,4595.99 C18.1 4301.99,4650.82 C5.2 4310.57,4698.23 UC1.P$13 4439.23,4698.23 ; C8.2 4394.28,4986.53 UC1.P$1 4427.81,4934.81 4446,4916.62 4446,4705 4439.23,4698.23 ; C14.2 4480.35,5050.45 UC1.P$64 4480.35,4978.65 4546.5,4912.5 4788.5,4912.5 ; C15.2 4471,4455 4519.72,4503.72 UC1.P$19 4519.72,4595.72 ; U2.1 U2.2 4483.52,4215.81 C22.1 4405,4137.29 4405,4038 ; C6.2 4859.99,5046.01 UC1.P$48 4815.81,4934.81 4791,4910 4788.5,4912.5 ; R7.2@4865,4056 4963.72,4056 4994.53,4086.81 4994.53,4073.47 5032,4036 5154,4036 5254,4136 R5.1@5273.72,4136 ; R7.2@4879.5,4055.5 4839,4015 4648.99,4015 4611.99,4052 4419,4052 4405,4038 ; C19.2@4993.99,4226.81 4993.99,4316 4993.99,4485.01 4928.19,4550.81 C7.2 4864.7,4554.09 UC1.P$32 4775.99,4605.01 4768.5,4612.5 ; 4439.23,4698.23 4439.23,4676.22 4519.72,4595.72 ; 4519.72,4595.72 4536.5,4612.5 4768.5,4612.5 ; 4768.5,4612.5 4788.5,4632.5 4788.5,4912.5
  Top w20: C7.2 4985.17,4668 5147.99,4668 ; R5.1@5273.72,4136 R5.1 5274.53,4270.28 C16.1 5192.99,4351.82 C4.A 5147.99,4461.81 IC6.2 5147.99,4668 ; PWR.4 5352,5256 5352,5077 5147.99,4872.99 IC6.4 5147.99,4668
  Top w22: PWR.1 PWR.2 PWR.3 PWR.4
VCC_IN: C17.1 D2.C D3.C IC6.3 | length 278.9
  Top w20: IC6.3 5297.98,4505.82 5297.98,4470.28 5305.71,4478 5374.69,4478 ; D2.C 5374.69,4478 ; D3.C 5374.69,4478
pads on no net: D6.1 D7.1 D8.1 D9.1 J1.2 J1.3 J1.4 J1.5_2 J1.6 J1.7 J1.8 OSC2.2 OSC2.3 U1.2 U1.3 U1.4 U1.5 U1.6 U1.7 U1.14 U1.15 U1.16 U1.17 U1.19 U1.21 U1.22 U2.5 U2.6
copper on no net:
  other v4: 3070.87,3070.87 6377.95,3070.87 3070.87,6377.95 6377.95,6377.95

## Polygon pours and split planes (outlines as drawn)
GND on Top "Top-No Net" (solid, remove dead copper, pour order 4): 2410,6843 2424,6829 7029,6829 7029,2285 2410,2285
GND on Bottom "Top-No Net" (solid, remove dead copper, pour order 6): 2036.84,7028.8 7391.84,7028.8 7391.84,2427.8 2036.84,2427.8

## Keep-outs
Keep-Out Layer:
  lines w10: 2894.93,3333.6 ccw(c3070.87,3070.87) 3334.9,2896.88 ; 2896.93,3336.04 ccw(c690,6811.18) 3591.07,3890.4 ; 2897.91,6112.14 cw(c691,2637) 3592.07,5557.76 ; 2898.42,6112.91 cw(c3070.87,6377.95) 3334.72,6552.21 ; 3334.86,2896.91 cw(c6810,690) 3889.24,3591.07 cw(c4724.41,2755.91) 5559.57,3591.07 ; 3336.04,6553.07 ccw(c6811.18,8760) 3890.4,5858.93 ; 3591.07,3889.24 ccw(c2755.91,4724.41) 3591.07,5559.57 ; 3889.24,5857.75 ccw(c4724.41,6692.91) 5559.57,5857.75 ; 5559.6,3591.07 cw(c2638.82,690) 6113.96,2896.93 ; 5560.76,5858.93 ccw(c2640,8760) 6115.14,6553.09 ; 5857.75,3889.24 cw(c6692.91,4724.41) 5857.75,5559.57 ; 5858.93,3889.24 ccw(c8760,6810) 6553.09,3334.86 ; 5858.93,5559.6 cw(c8760,2638.82) 6553.07,6113.96 ; 6113.91,2896.89 ccw(c6377.95,3070.87) 6552.76,3334.36 ; 6114.82,6553.3 cw(c6377.95,6377.95) 6552.75,6114.45

## Silkscreen, mask and mechanical layers (free items; w line width, h text height)
Top Overlay:
  lines w6: 4483,5476 4657,5302 4831,5476 4483,5476
Dimension:
  lines w6: 70,170 170,70
Unrouted:
  drawing of 162 lines, arcs and shapes, not listed